# Altium PCB FPV0.2.1.PcbDoc
Units mil, origin at the board's own origin, x right, y up, seen from the top; angles counter-clockwise.
Board outline 6000 x 4000 mil, 2 copper layers (Top Layer, Bottom Layer); 6 components, 13 nets, 59 pads, 0 vias.
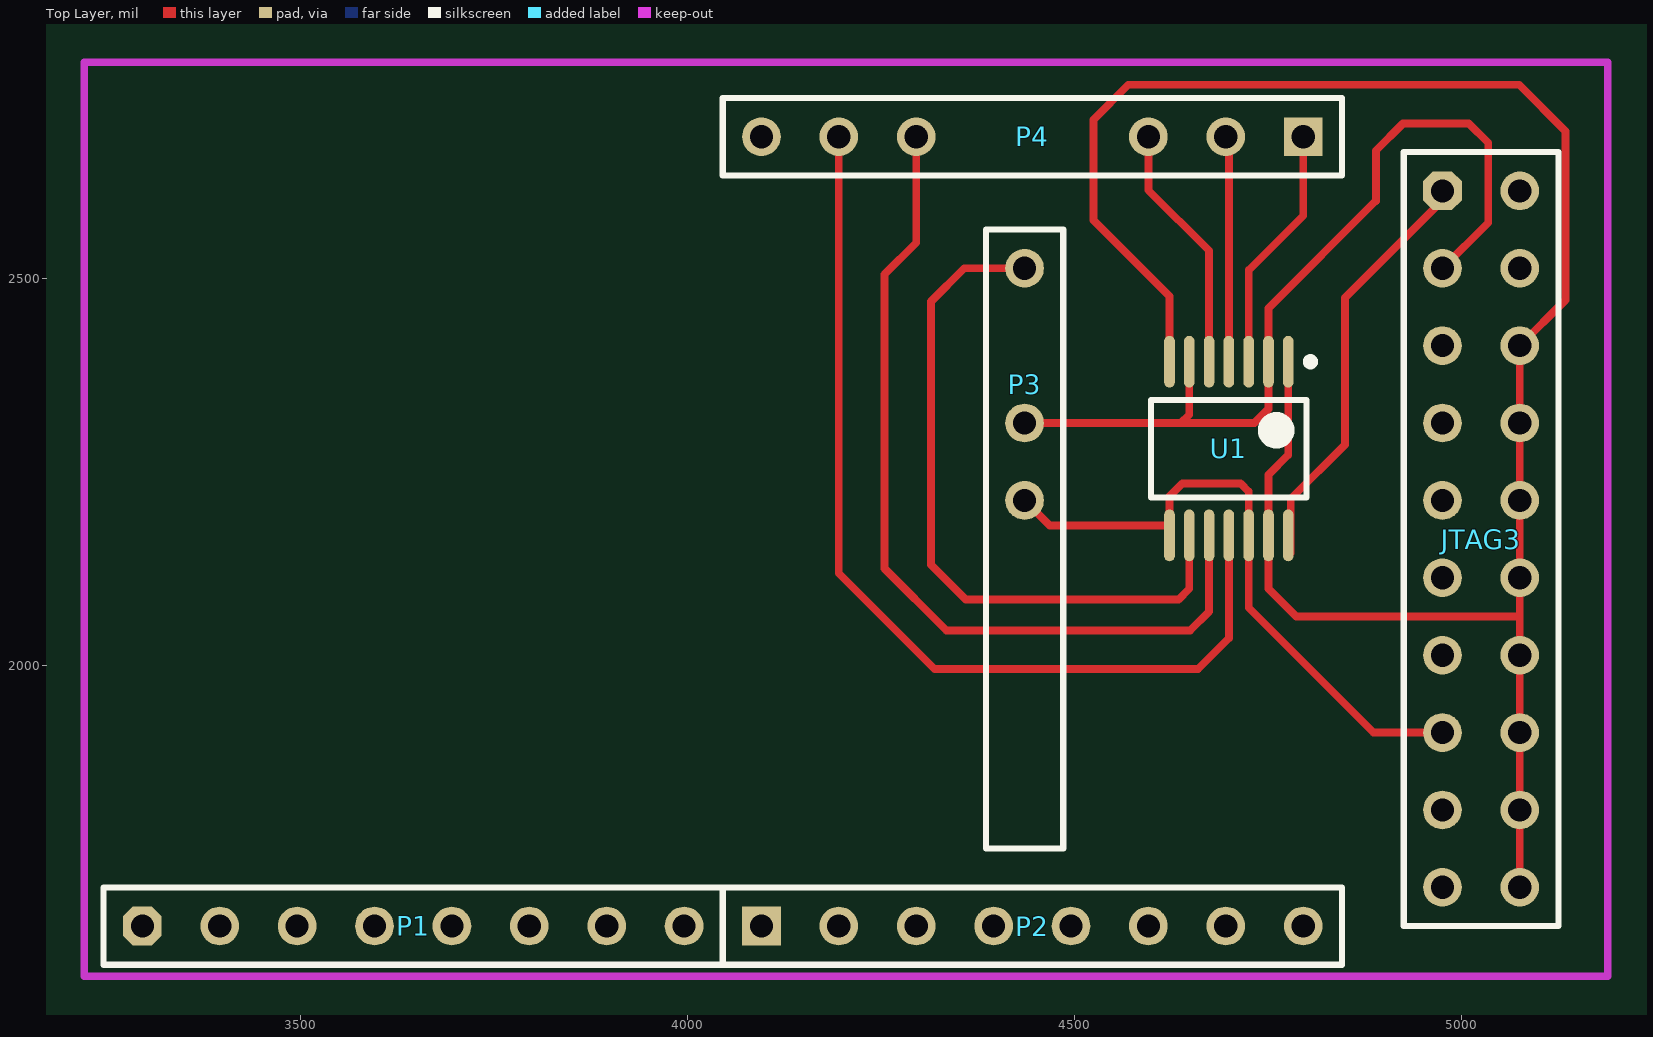
[diagram p0: Top Layer view]
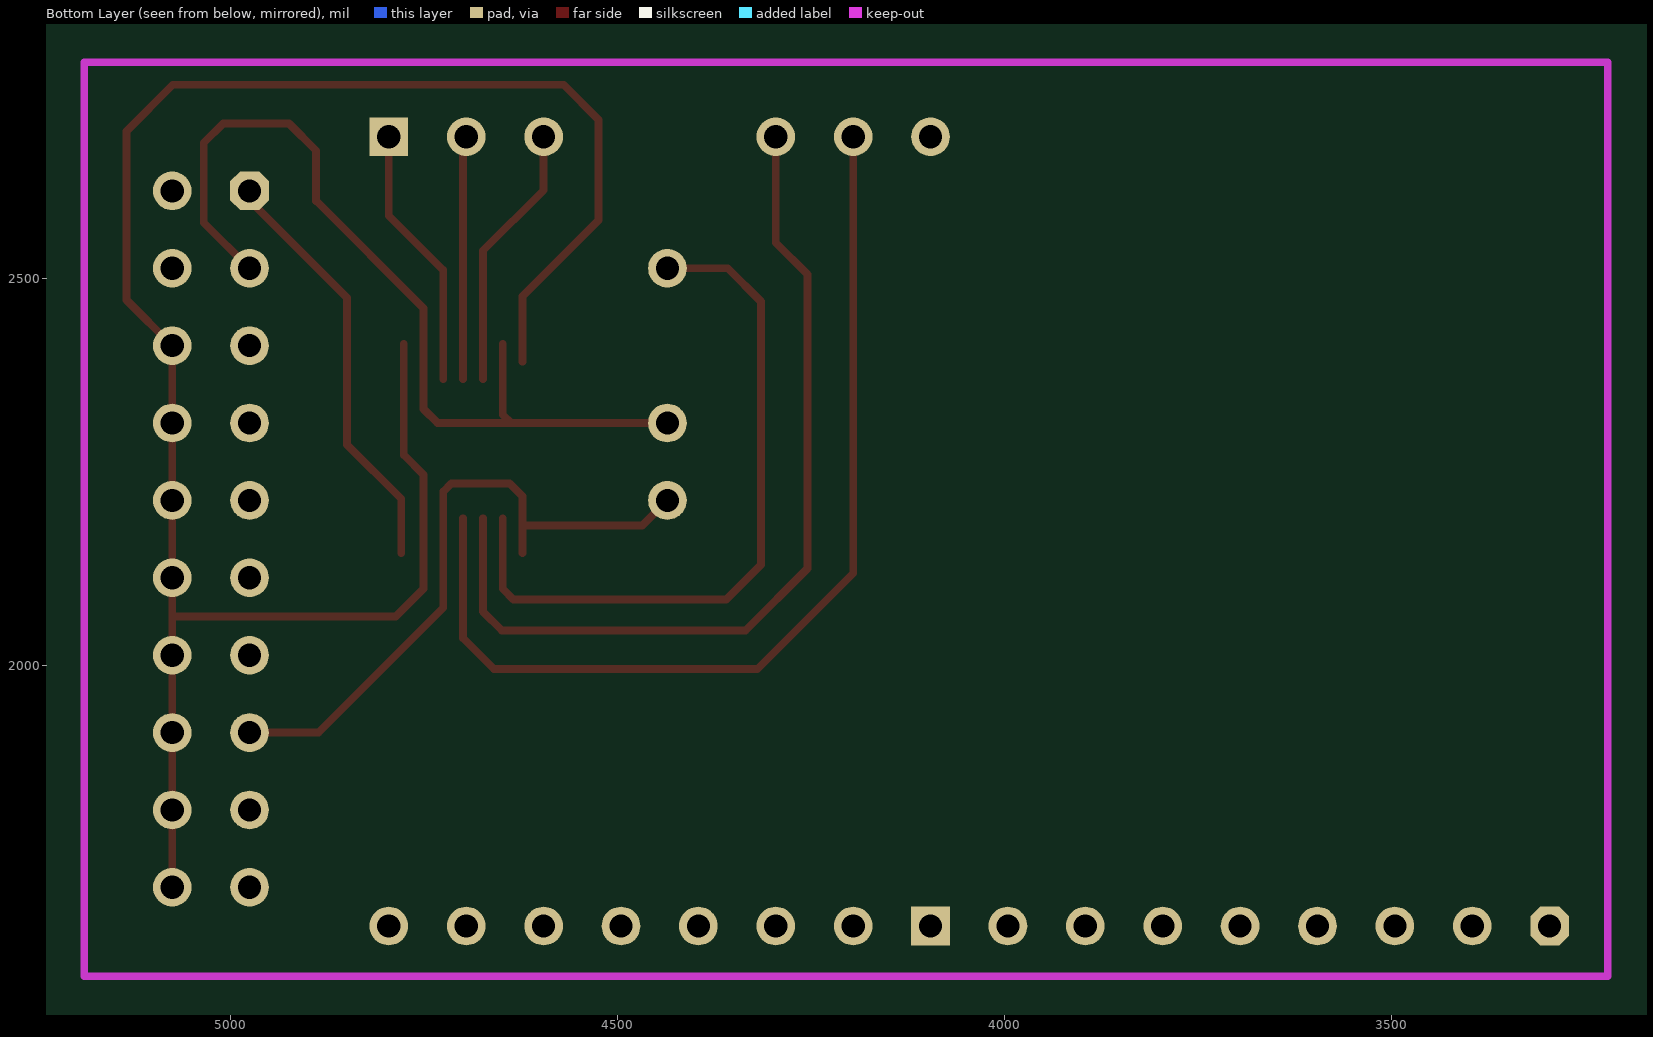
[diagram p1: Bottom Layer view, seen from below]

## Layer stack, top to bottom
Top Layer: signal copper 1.4
Dielectric: dielectric 12.6, FR-4, Dk 4.8
Bottom Layer: signal copper 1.4

## Board outline
1000,1000 7000,1000 7000,5000 1000,5000

## Design rules (kind name [scope] priority, off if disabled: settings)
Clearance [All] p1: gap=5
PolygonConnect [All] p1: connectstyle=Relief reliefconductorwidth=10 reliefentries=4 polygonreliefangle="90 Angle" airgapwidth=10
RoutingVias [All] p1: holewidth=28 width=50 viastyle="Through Hole" minholewidth=28 minwidth=50 maxholewidth=28 maxwidth=50
SolderMaskExpansion [All] p1: expansion=4
Width [All] p1: maxlimit=50 minlimit=17 preferedwidth=25 minimp=50.000000 maximp=50.000000 favimp=50.000000
28 further rules are at their usual default settings.

## Components (designator, comment, footprint, x,y, rotation, side; value= is the part's Value field where it differs from the comment)
JTAG3 "Header 10X2" HDR2X10 4975.97,2613 r270 top
P1 "Header 8" HDR1X8#1 3295.97,1663 r0 top
P2 "Header 8" HDR1X8#2 4095.97,1663 r0 top
P3 "Header 8" HDR1X8#3 4435.97,1813 r90 top
P4 "Header 8" HDR1X8#4 4795.97,2683 r180 top
U1 "74HC125" "SOP127P600-8N 74AHC125" 4700,2280 r270 top

## Footprints (in the part's own frame and the unit in brackets; to place one, negate y for a bottom-side part, rotate by r counter-clockwise, add the part's x,y. Pads: shape width x height; smd on the part's side, far side on the other; paste and mask are expansions set on the pad)
HDR1X8#1 [mil] "Connector; Header; 8 Position"
  oct 50x50 hole 30: 1(0,0)
  round 50 hole 30: 2(100,0) 3(200,0) 4(300,0) 5(400,0) 6(500,0) 7(600,0) 8(700,0)
  silkscreen extent -50,-50 750,50, body extent -50,-50 750,50, height 298
HDR1X8#2 [mil] "Connector; Header; 8 Position"
  rect 50x50 hole 30: 1(0,0)
  round 50 hole 30: 2(100,0) 3(200,0) 4(300,0) 5(400,0) 6(500,0) 7(600,0) 8(700,0)
  silkscreen extent -50,-50 750,50, body extent -50,-50 750,50, height 298
HDR1X8#3 [mil] "Connector; Header; 8 Position"
  round 50 hole 30: 5(400,0) 6(500,0) 8(700,0)
  silkscreen extent -50,-50 750,50, body extent -50,-50 750,50, height 298
HDR1X8#4 [mil] "Connector; Header; 8 Position"
  rect 50x50 hole 30: 1(0,0)
  round 50 hole 30: 2(100,0) 3(200,0) 6(500,0) 7(600,0) 8(700,0)
  silkscreen extent -50,-50 750,50, body extent -50,-50 750,50, height 298
HDR2X10 [mil] "Connector; Header; 10x2 Position"
  oct 50x50 hole 30: 1(0,0)
  round 50 hole 30: 2(0,100) 3(100,0) 4(100,100) 5(200,0) 6(200,100) 7(300,0) 8(300,100) 9(400,0) 10(400,100) 11(500,0) 12(500,100) 13(600,0) 14(600,100) 15(700,0) 16(700,100) 17(800,0) 18(800,100) 19(900,0) 20(900,100)
  silkscreen extent -50,-50 950,150, body extent -50,-50 950,150, height 298
"SOP127P600-8N 74AHC125" [mm]
  oval 1.7x0.35 smd: 1(-2.85,1.95) 2(-2.85,1.3) 3(-2.85,0.65) 4(-2.85,0) 5(-2.85,-0.65) 6(-2.85,-1.3) 7(-2.85,-1.95) 8(2.85,-1.95) 9(2.85,-1.3) 10(2.85,-0.65) 11(2.85,0) 12(2.85,0.65) 13(2.85,1.3) 14(2.85,1.95)
  silkscreen extent -2.97,-2.55 1.6,2.8, body extent -2.25,-2.55 2.25,2.55, height 1.2

## Part data
JTAG3: "Header, 10-Pin, Dual row"
P1 P2 P3 P4: "Header, 8-Pin"
U1: library part 74HC126

## Nets (pads, with @x,y where several pads share a name; then routed paths per layer and width w, separated by ;. In a path a pad name is that pad's centre, name@x,y a point inside that pad or via, vN(x,y) a via of type N, cw(c..) or ccw(c..) an arc to the next point about the centre after c; other vN are vias at no path point)
3.3V: JTAG3.1 U1.14 | length 549.2
  Top Layer w10: U1.14@4780,2145 4780,2215 4850,2285 4850,2475 4975.97,2600.97 JTAG3.1
FT_RXD: P1.2
FT_TXD: P1.1
GND: JTAG3.6 JTAG3.8 JTAG3.10 JTAG3.12 JTAG3.14 JTAG3.16 JTAG3.18 JTAG3.20 U1.1 U1.7 U1.13 | length 2672.8
  Top Layer w10: U1.7 4623.23,2476.77 4525,2575 4525,2705 4570,2750 5075,2750 5135,2690 5135,2472.02 JTAG3.6 JTAG3.8 JTAG3.10 JTAG3.12 JTAG3.14 JTAG3.16 JTAG3.18 JTAG3.20 ; U1.1@4776.77,2415 U1.1 4776.77,2271.77 4751.18,2246.18 U1.13 4751.18,2098.82 4787,2063 5073.97,2063
GPIOH0: P4.1 U1.3 | length 342.1
  Top Layer w10: U1.3@4725.59,2370 U1.3 4725.59,2510.59 4795.97,2580.97 P4.1
GPIOH1: P4.2 U1.4 | length 314.7
  Top Layer w10: P4.2 4695.97,2669.03 4700,2665 U1.4 U1.4@4700,2370
GPIOH2: P4.3 U1.5 | length 345.5
  Top Layer w10: P4.3 4595.97,2614.03 4674.41,2535.59 U1.5 U1.5@4674.41,2370
GPIOH5: P4.6 U1.10 | length 1158.2
  Top Layer w10: P4.6 4295.97,2545.97 4255,2505 4255,2125 4335,2045 4650,2045 4674.41,2069.41 U1.10 U1.10@4674.41,2190
GPIOH6: P4.7 U1.11 | length 1290.9
  Top Layer w10: P4.7 4195.97,2119.03 4320,1995 4660,1995 4700,2035 U1.11 U1.11@4700,2190
GPIOH7: P4.8
GPIOL3: P3.8 U1.9 | length 928.1
  Top Layer w10: P3.8 4358,2513 4315,2470 4315,2130 4360,2085 4635,2085 4648.82,2098.82 U1.9 U1.9@4648.82,2190
NTRST: JTAG3.3 P3.6 U1.2 U1.6 | length 1176.9
  Top Layer w10: P3.6 4638,2313 ; U1.6@4648.82,2415 U1.6 4648.82,2323.82 4638,2313 ; JTAG3.3 5035,2572.02 5035,2675 5010,2700 4925,2700 4890,2665 4890,2600 4751.18,2461.18 U1.2 4751.18,2331.18 4733,2313 4638,2313
RESET: JTAG3.15 P3.5 U1.8 U1.12 | length 854.8
  Top Layer w10: P3.5 4468.38,2180.59 U1.8@4623.23,2180.59 ; U1.8@4623.23,2145 U1.8 U1.8@4623.23,2180.59 ; JTAG3.15 4887,1913 4725.59,2074.41 U1.12 4725.59,2224.41 4715,2235 4640,2235 4623.23,2218.23 U1.8@4623.23,2180.59
pads on no net: JTAG3.2 JTAG3.4 JTAG3.5 JTAG3.7 JTAG3.9 JTAG3.11 JTAG3.13 JTAG3.17 JTAG3.19 P1.3 P1.4 P1.5 P1.6 P1.7 P1.8 P2.1 P2.2 P2.3 P2.4 P2.5 P2.6 P2.7 P2.8

## Keep-outs
Keep-Out Layer:
  lines w10: 3220.97,1598 3220.97,1693 3220.97,2779.1 5189.48,2779.1 5189.48,1598 3315.97,1598 3220.97,1598